# Altium PCB zb_sensor.PcbDoc
Units mil, origin at the board's own origin, x right, y up, seen from the top; angles counter-clockwise.
Board outline 2050 x 2075 mil, 2 copper layers (Top Layer, Bottom Layer); 38 components, 26 nets, 118 pads, 6 vias.
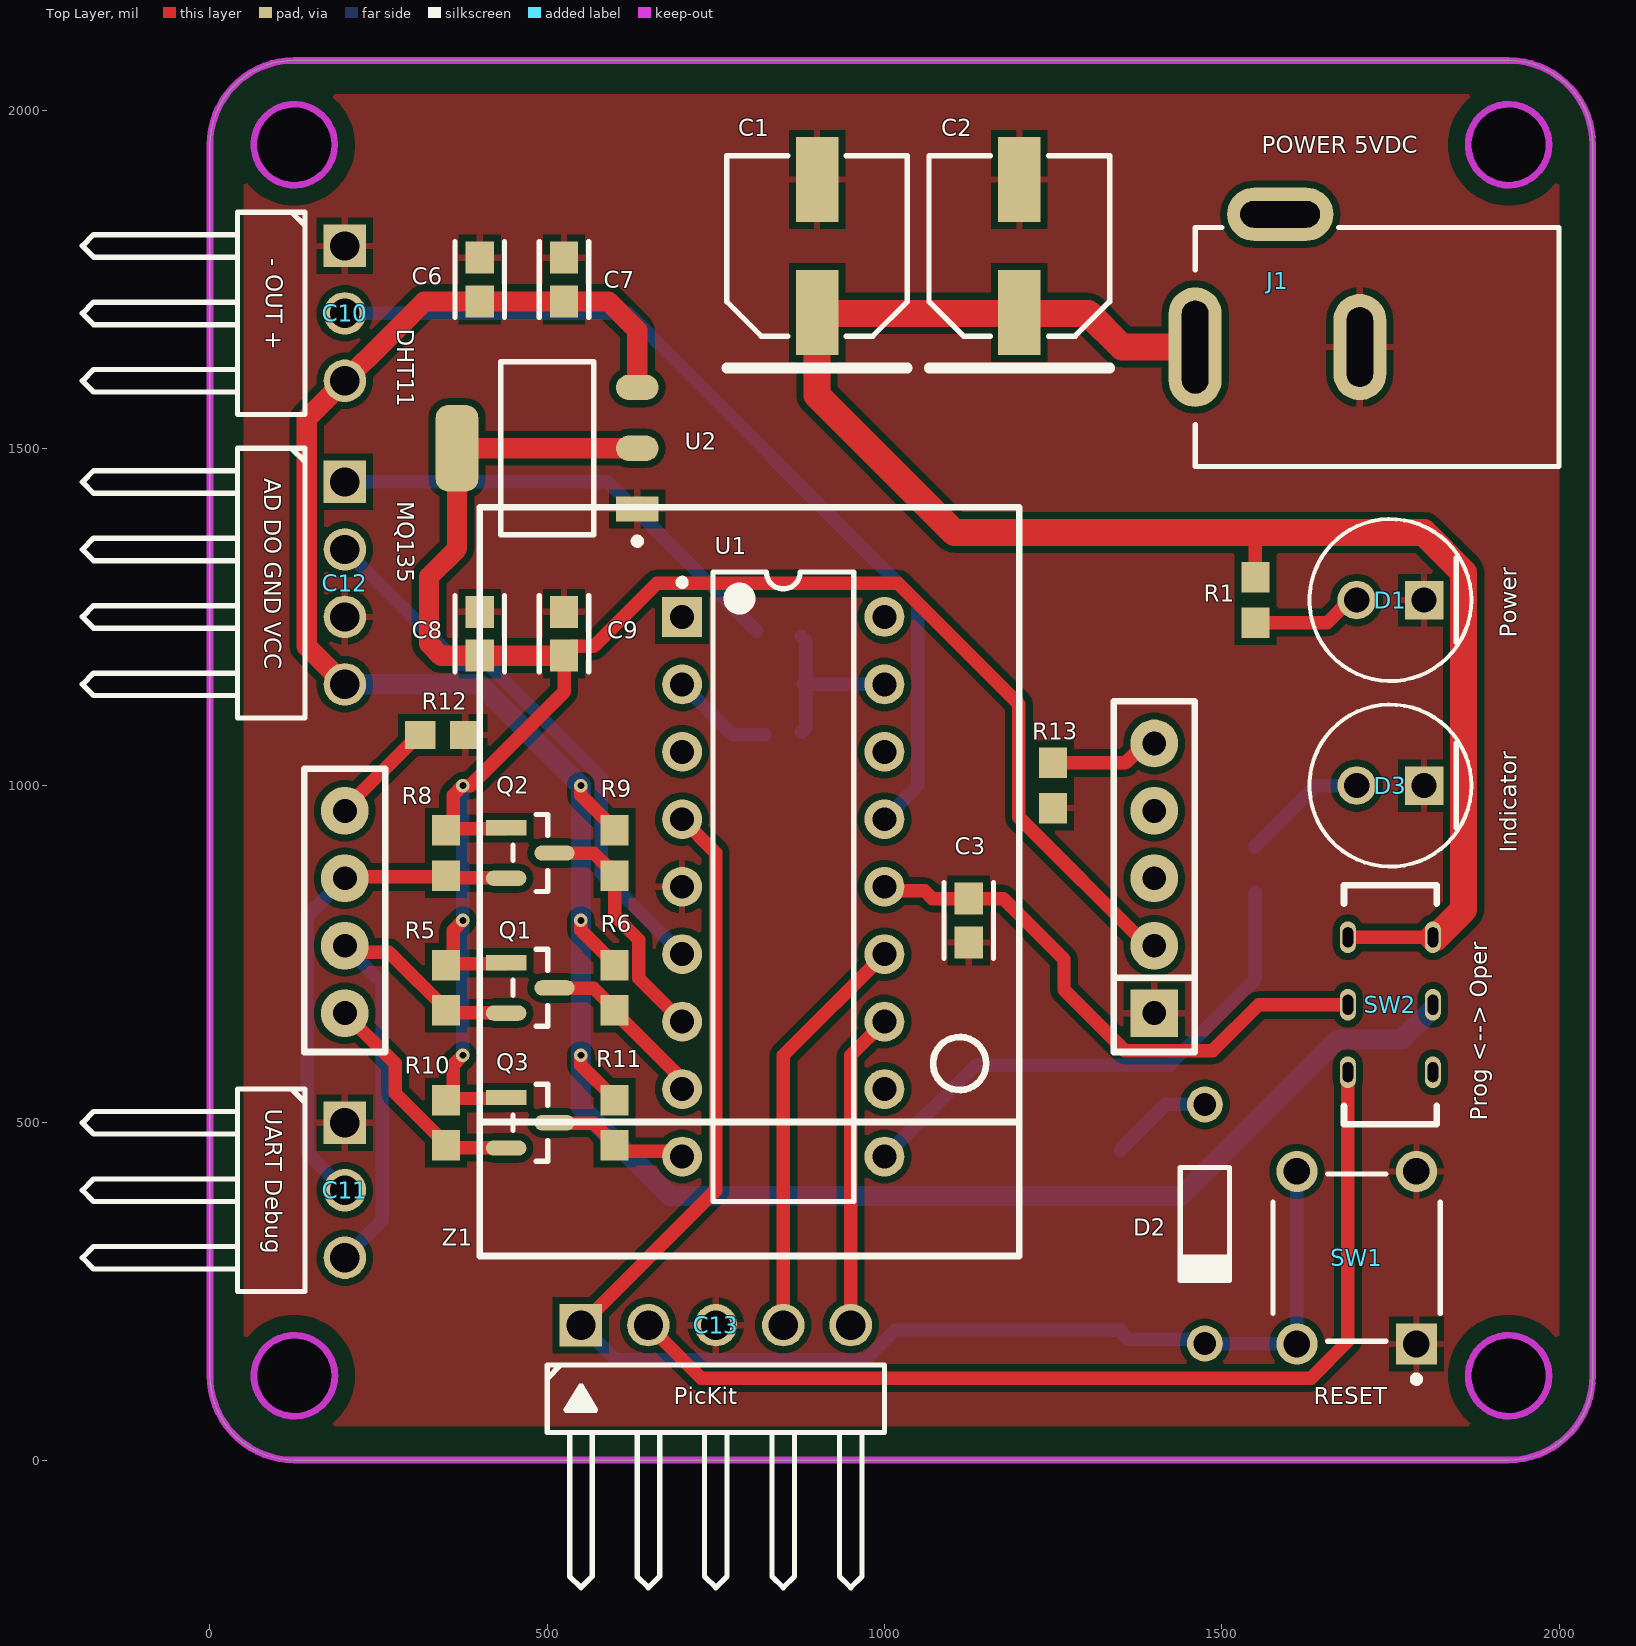
[diagram p0: Top Layer view]
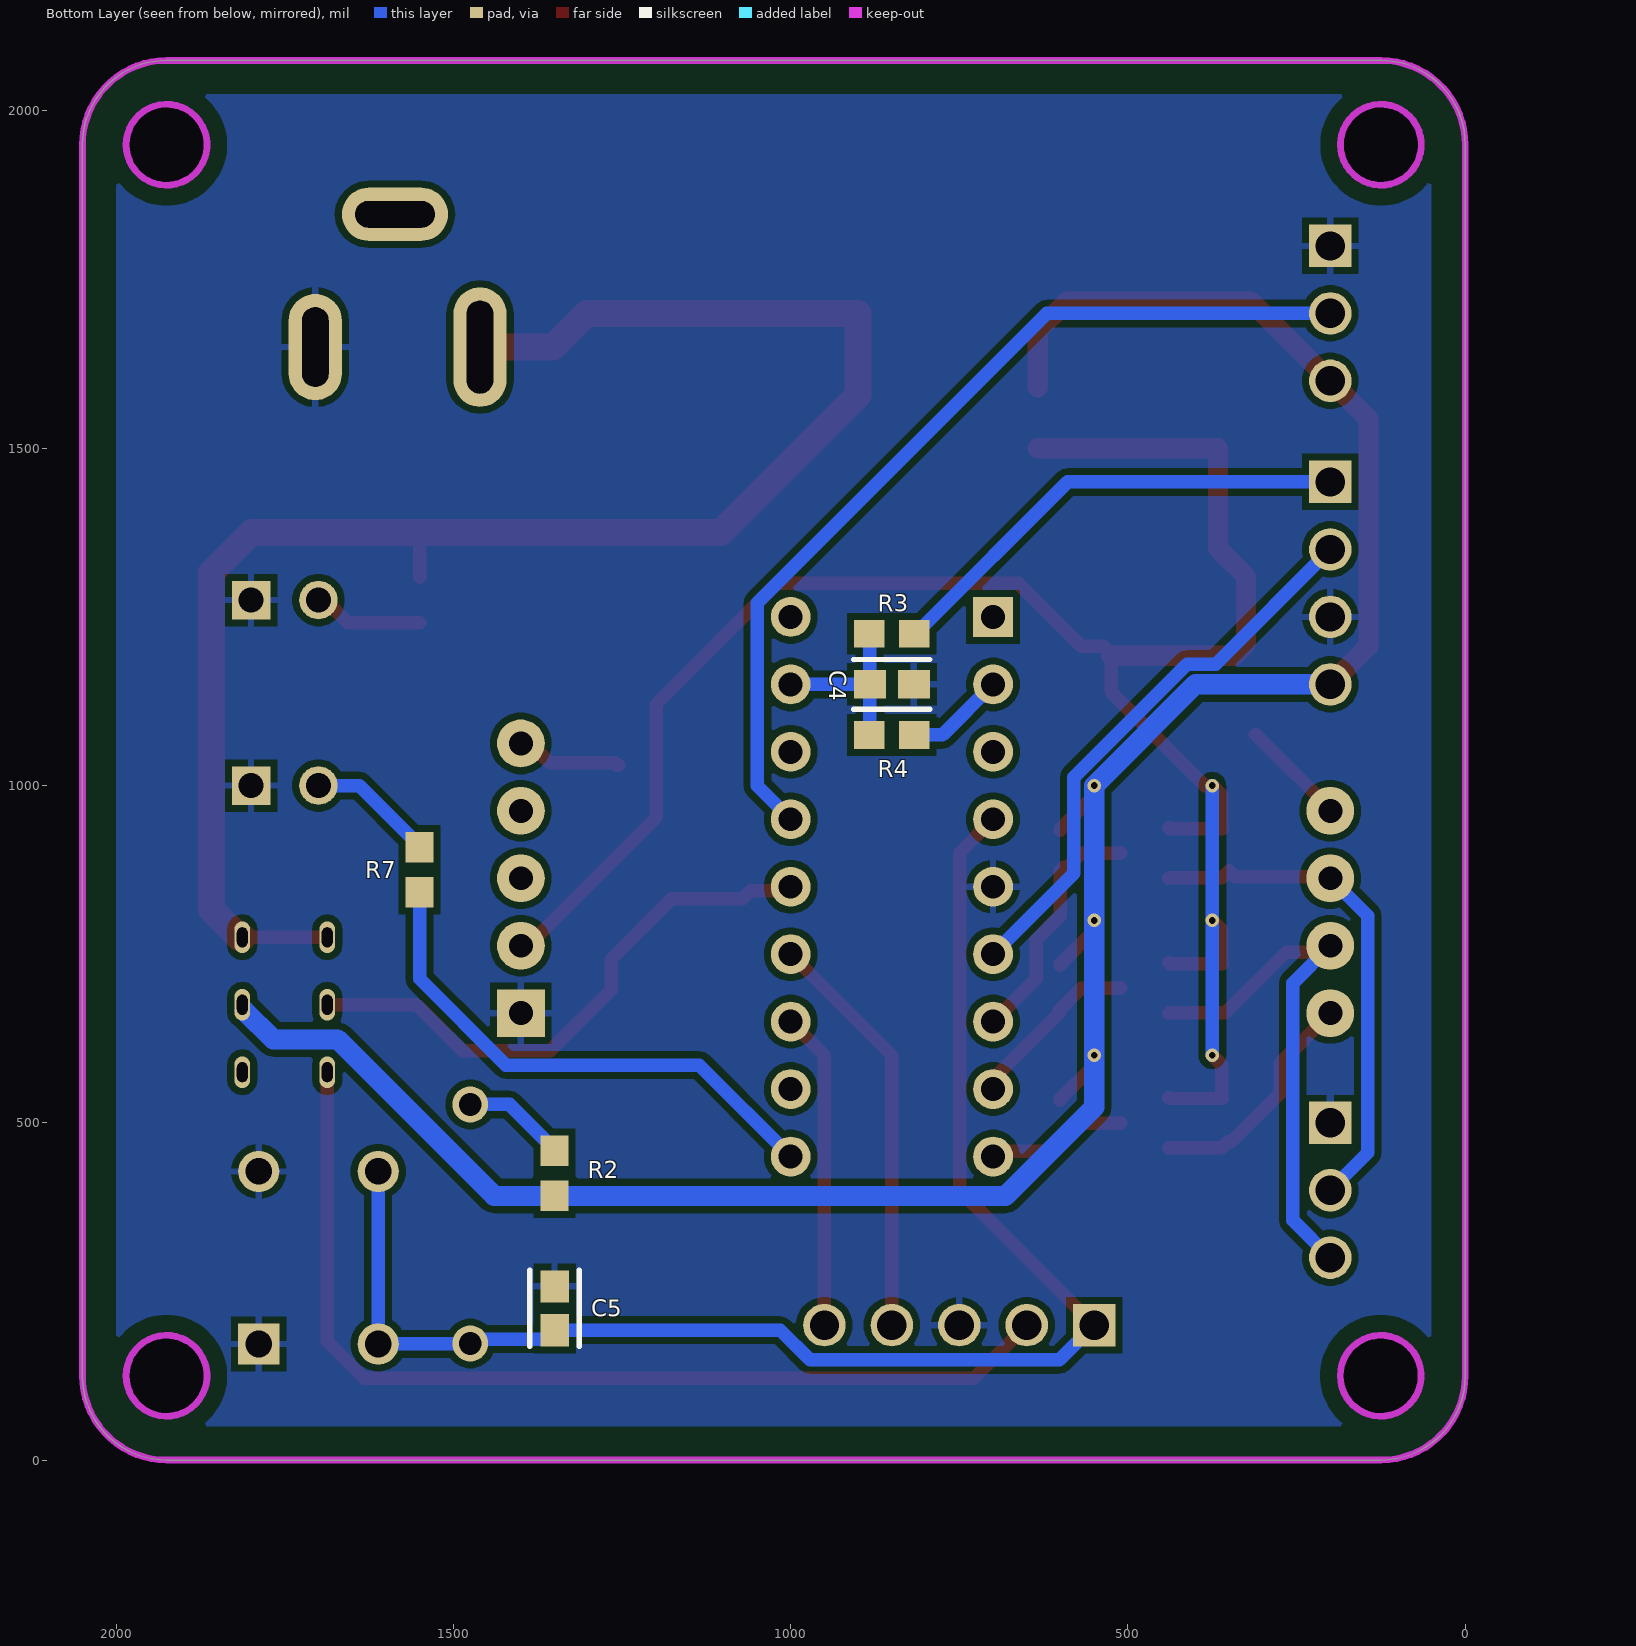
[diagram p1: Bottom Layer view, seen from below]
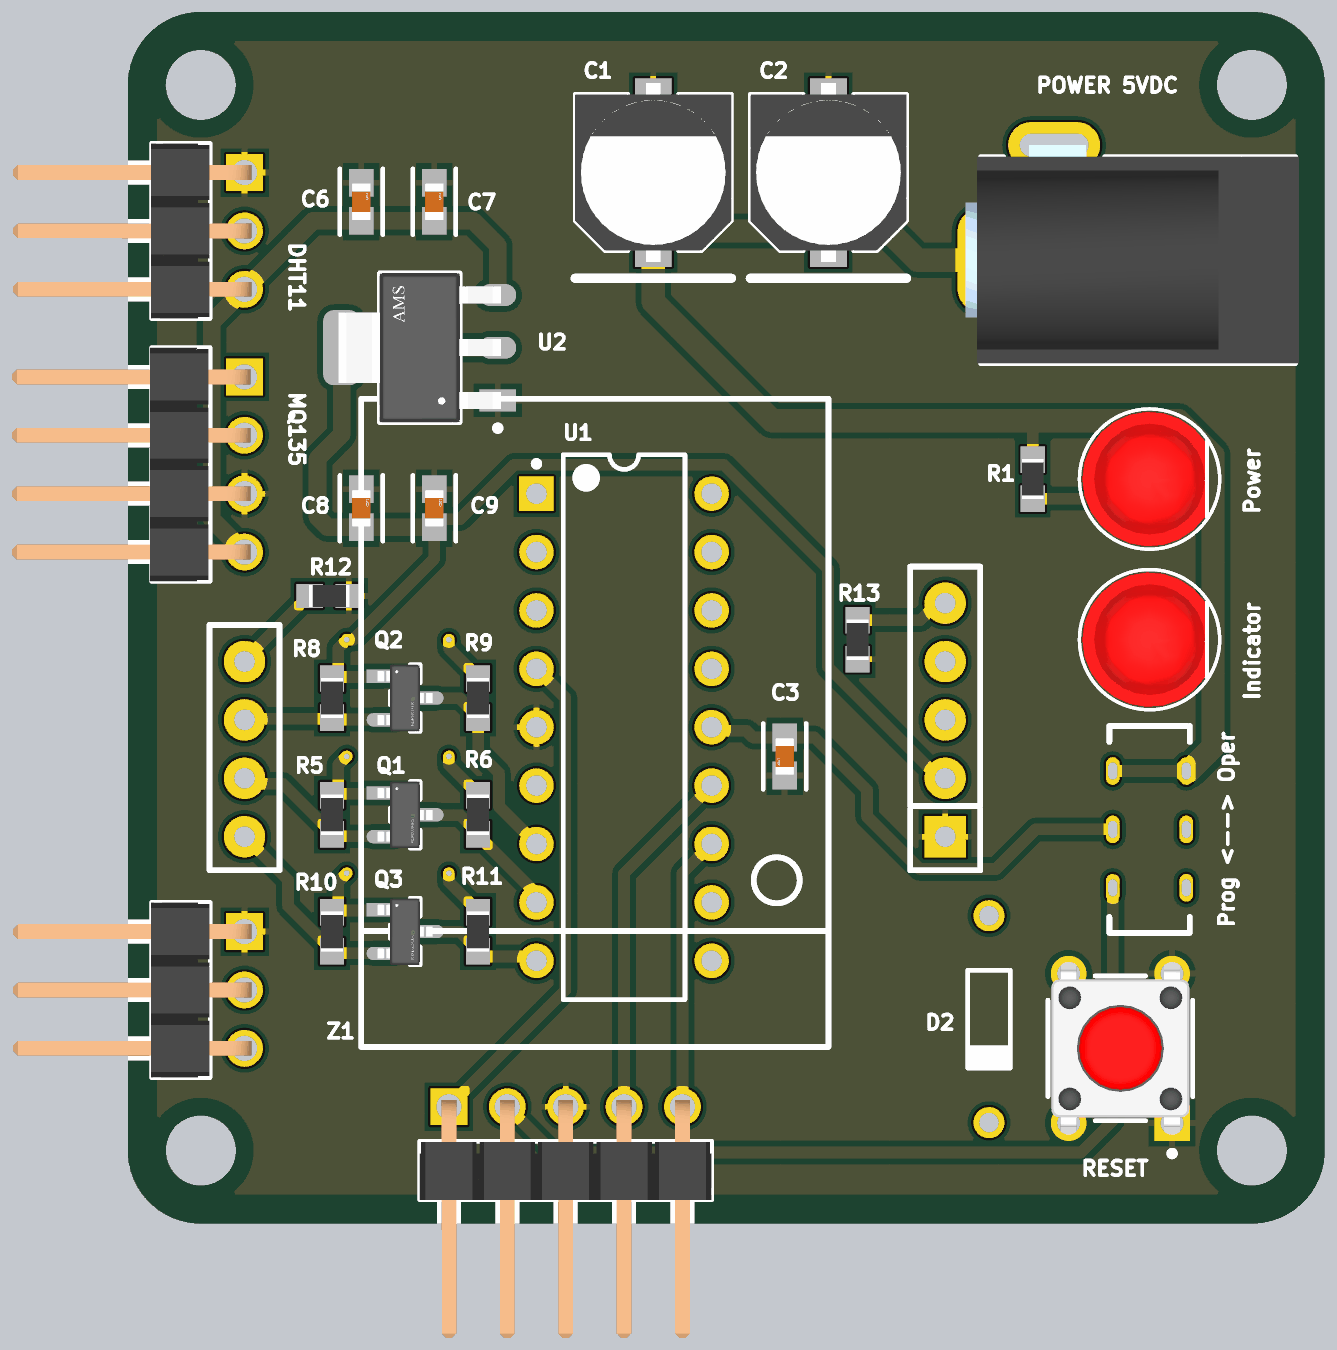
[diagram p2: 3D render of the assembled board from above, using the file's embedded part models]
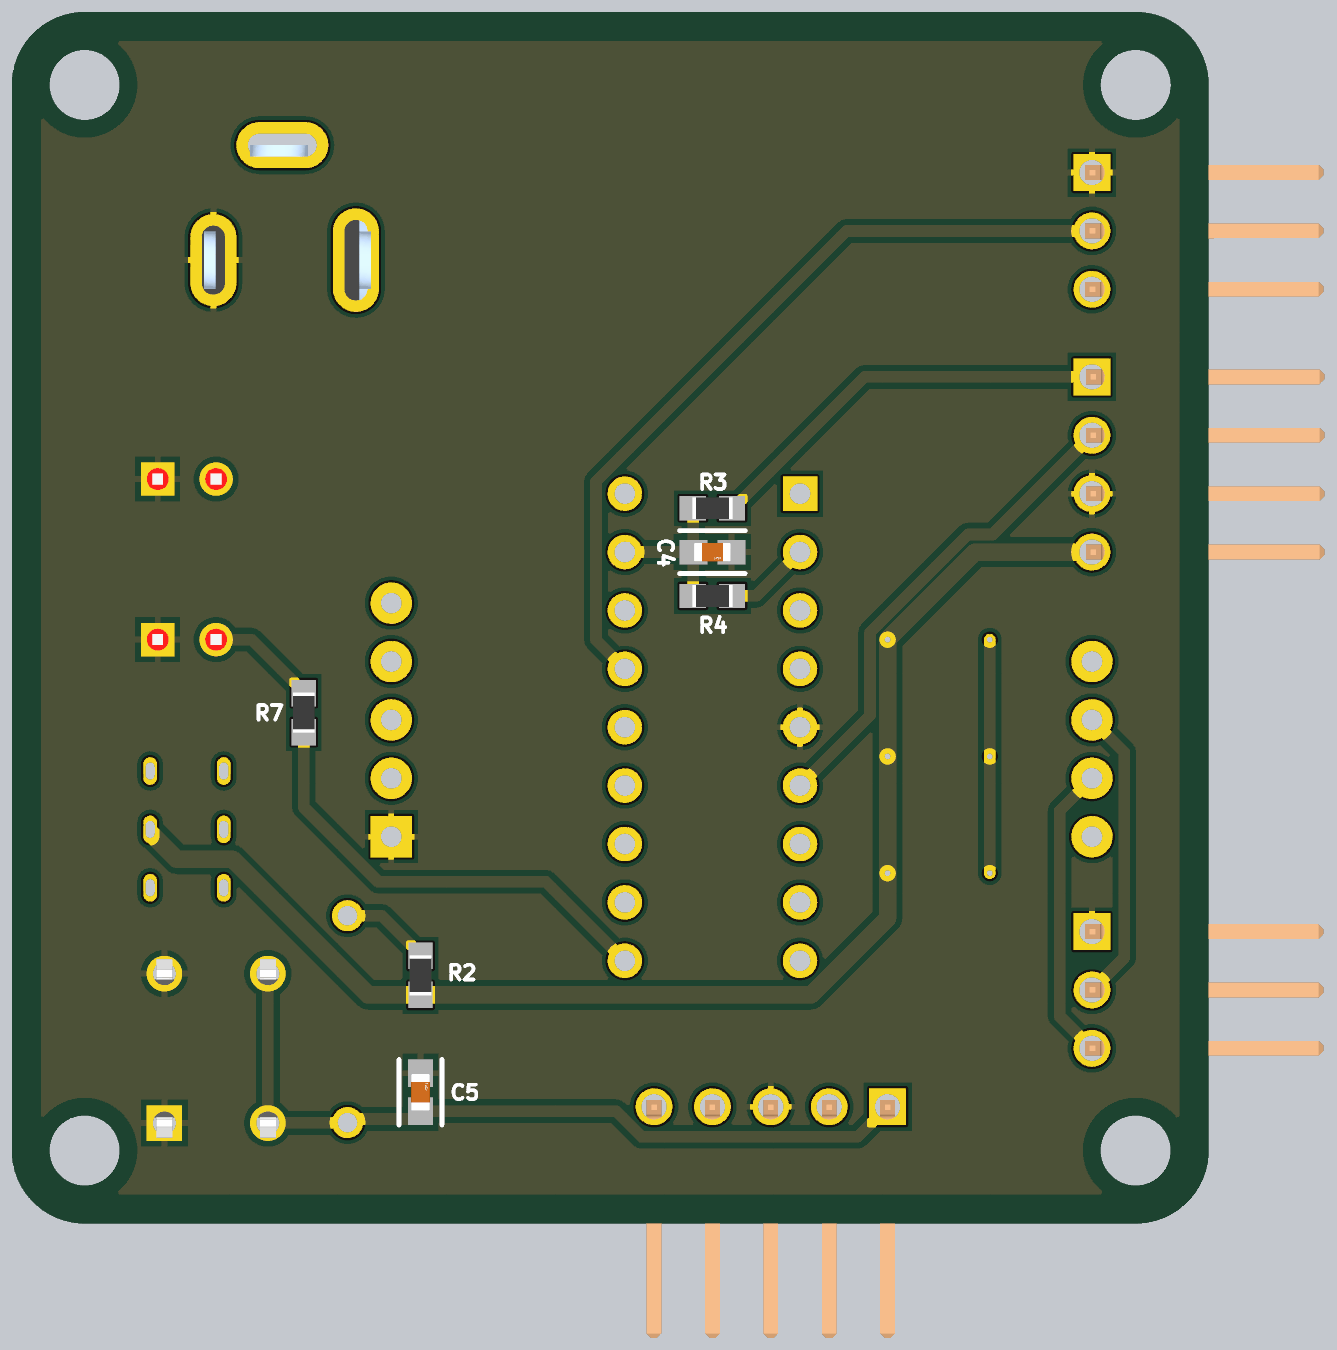
[diagram p3: 3D render of the assembled board from below, using the file's embedded part models]

## Layer stack, top to bottom
Top Solder: solder mask 0.4, Solder Resist, Dk 3.5
Top Layer: signal copper 1.4
Dielectric 1: dielectric 12.6, FR-4, Dk 4.8
Bottom Layer: signal copper 1.4
Bottom Solder: solder mask 0.4, Solder Resist, Dk 3.5

## Board outline
125,0 cw(c125,125) 0,125 0,1950 cw(c125,1950) 125,2075 1925,2075 cw(c1925,1950) 2050,1950 2050,125 cw(c1925,125) 1925,0
cut-out: 125,1890 cw(c125,1950) 65,1950 cw(c125,1950) 125,2010 cw(c125,1950) 185,1950 cw(c125,1950)
cut-out: 1925.25,64.98 cw(c1925.25,124.98) 1865.25,124.98 cw(c1925.25,124.98) 1925.25,184.98 cw(c1925.25,124.98) 1985.25,124.98 cw(c1925.25,124.98)
cut-out: 1925.25,1889.98 cw(c1925.25,1949.98) 1865.25,1949.98 cw(c1925.25,1949.98) 1925.25,2009.98 cw(c1925.25,1949.98) 1985.25,1949.98 cw(c1925.25,1949.98)
cut-out: 125.25,64.98 cw(c125.25,124.98) 65.25,124.98 cw(c125.25,124.98) 125.25,184.98 cw(c125.25,124.98) 185.25,124.98 cw(c125.25,124.98)

## Design rules (kind name [scope] priority, off if disabled: settings)
Clearance [All] p1: gap=5 ignorepadtopadclearanceinfootprint=TRUE except(10: Track-THPad Track-Poly SMDPad-Poly THPad-Poly Via-Poly; 30: Poly-Region)
ComponentClearance [All] p1: gap=0 collisioncheckmode=3 verticalgap=0 showdistances=FALSE
HoleSize [All] p1: absolutevalues=TRUE maxlimit=150 minlimit=1 maxpercent=80.000 minpercent=20.000
MinimumSolderMaskSliver [All] p1: minsoldermaskwidth=1
PolygonConnect [All] p1: connectstyle=Relief reliefconductorwidth=10 reliefentries=4 polygonreliefangle="90 Angle" airgapwidth=10
RoutingVias [All] p1: holewidth=10 width=20 viastyle="Through Hole" minholewidth=5 minwidth=10 maxholewidth=20 maxwidth=50
SilkToSilkClearance [All] p1: silktosilkclearance=5
SilkToSolderMaskClearance [IsPad] p1: minsilkscreentomaskgap=5 clearancetoexposedcopper=TRUE
SolderMaskExpansion [All] p1: expansion=4 istentingtop=FALSE
Width [All] p1: maxlimit=100 minlimit=10 preferedwidth=20
25 further rules are at their usual default settings.

## Components (designator, comment, footprint, x,y, rotation, side; value= is the part's Value field where it differs from the comment)
C1 "100uF" PNSC-FK-V-D8_V 900,1800 r90 top
C2 "100uF" PNSC-FK-V-D8_V 1200,1800 r90 top
C3 "0.1uF" FP-0603-L_1_6_0_15-W_0_81-IPC_A 1125,800 r270 top
C4 "0.1uF" FP-0603-L_1_6_0_15-W_0_81-IPC_A 850,1150 r180 bottom
C5 "10μF" FP-0603-L_1_6_0_15-W_0_81-IPC_A 1350,225 r90 bottom
C6 "100nF" FP-0603-L_1_6_0_15-W_0_81-IPC_A 400,1750 r90 top
C7 "10μF" FP-0603-L_1_6_0_15-W_0_81-IPC_A 525,1750 r90 top
C8 "10μF" FP-0603-L_1_6_0_15-W_0_81-IPC_A 400,1225 r90 top
C9 "100nF" FP-0603-L_1_6_0_15-W_0_81-IPC_A 525,1225 r90 top
C10 "DHT11" JP3-D1C 100,1550 r270 top
C11 "UART Debug" JP3-D1C 100,250 r270 top
C12 "MQ135" JP4-D1C 100,1100 r270 top
C13 "PicKit" JP5-D1C 1000,100 r0 top
D1 "Power" FP-HLMP-4700-MFG 1750,1275 r180 top
D2 "1N4148" NXP-SOD27-2_V 1475,350 r270 top
D3 "Indicator" FP-HLMP-4700-MFG 1750,1000 r180 top
J1 "POWER 5VDC" KYCN-KLDX-0202-B_V 2000,1650 r180 top
Q1 "BSS138" FP-318-08-IPC_B 475,700 r0 top
Q2 "BSS138" FP-318-08-IPC_B 475,900 r0 top
Q3 "BSS138" FP-318-08-IPC_B 475,500 r0 top
R1 "1K" RESC1609X55X30ML15T15 1550,1275 r90 top
R2 "10K" RESC1609X55X30ML15T15 1350,425 r270 bottom
R3 "47K" RESC1609X55X30ML15T15 850,1225 r180 bottom
R4 "47K" RESC1609X55X30ML15T15 850,1075 r0 bottom
R5 "10K" RESC1609X55X30ML15T15 350,700 r90 top
R6 "10K" RESC1609X55X30ML15T15 600,700 r90 top
R7 "510" RESC1609X55X30ML15T15 1550,875 r270 bottom
R8 "10K" RESC1609X55X30ML15T15 350,900 r90 top
R9 "10K" RESC1609X55X30ML15T15 600,900 r90 top
R10 "10K" RESC1609X55X30ML15T15 350,500 r90 top
R11 "10K" RESC1609X55X30ML15T15 600,500 r90 top
R12 "10K" RESC1609X55X30ML15T15 345,1075 r180 top
R13 "10K" RESC1609X55X30ML15T15 1250,1000 r90 top
SW1 "RESET" FP-EVQ-PAG05R-MFG 1700,300 r180 top
SW2 "MH-G6" MH-G6 1750,675 r270 top
U1 "PIC16F628A-I/P" PDIP300-P18 850,850 r0 top
U2 "AMS1117-3.3" FP-AMS1117-IPC_A 500,1500 r180 top
Z1 "SZ1V5" "SZ1V5 PINOUT MODULE" 800,975 r180 top

## Footprints (in the part's own frame and the unit in brackets; to place one, negate y for a bottom-side part, rotate by r counter-clockwise, add the part's x,y. Pads: shape width x height; smd on the part's side, far side on the other; paste and mask are expansions set on the pad)
FP-318-08-IPC_B [mm]
  rect 1.524x0.578 smd paste+0 mask+0: 1(-0.91,0.95)
  rrect100% 1.524x0.578 smd paste+0 mask+0: 2(-0.91,-0.95) 3(0.91,0)
  silkscreen extent -0.65,-1.45 0.65,1.45, body extent -1.92,-1.7 1.92,1.7, height 0.25
FP-0603-L_1_6_0_15-W_0_81-IPC_A [mil]
  rect 47.5x42.06 smd paste+0 mask+0: 1(-32.51,0) 2(32.51,0)
  silkscreen extent -56,-37 56,37, body extent -76,-41 76,41, height 10
FP-AMS1117-IPC_A [mm]
  rect 1.604x0.952 smd paste+0 mask+0: 1(-3.395,2.29)
  rrect100% 1.604x0.952 smd paste+0 mask+0: 2(-3.395,0) 3(-3.395,-2.29)
  rrect59% 1.604x3.262 smd paste+0 mask+0: 4(3.395,0)
  silkscreen extent -3.52,-3.25 1.75,3.62, body extent -4.7,-3.75 4.7,3.75, height 0.25
FP-EVQ-PAG05R-MFG [mm]
  rect 1.55x1.55 hole 1 paste-1000 mask+0: A(-2.25,3.25)
  round 1.55 hole 1 paste-1000 mask+0: A'(-2.25,-3.25) B(2.25,3.25) B'(2.25,-3.25)
  silkscreen extent -3.15,-3.15 3.15,4.7, body extent -3.25,-4.13 3.25,4.13, height 0.25
FP-HLMP-4700-MFG [mm]
  rect 1.45x1.45 hole 0.95 paste-1000 mask+0: 1(-1.27,0)
  round 1.45 hole 0.95 paste-1000 mask+0: 2(1.27,0)
  silkscreen extent -3.05,-3.05 3.05,3.05, body extent -3.15,-3.15 3.15,3.15, height 0.25
JP3-D1C [mm] "3 pins, 1 row, right angled, gold plating"
  rect 1.6x1.6 hole 1.1: 1(-6.35,2.54)
  round 1.6 hole 1.1: 2(-3.81,2.54) 3(-1.27,2.54)
  silkscreen extent -7.62,-7.34 0,1.04, body extent -7.62,-7.52 0,2.84, height 2.55
JP4-D1C [mm] "4 pins, 1 row, right angled, gold plating"
  rect 1.6x1.6 hole 1.1: 1(-8.89,2.54)
  round 1.6 hole 1.1: 2(-6.35,2.54) 3(-3.81,2.54) 4(-1.27,2.54)
  silkscreen extent -10.16,-7.34 0,1.04, body extent -10.16,-7.57 0,2.79, height 2.54
JP5-D1C [mm] "5 pins, 1 row, right angled, gold plating"
  rect 1.6x1.6 hole 1.1: 1(-11.43,2.54)
  round 1.6 hole 1.1: 2(-8.89,2.54) 3(-6.35,2.54) 4(-3.81,2.54) 5(-1.27,2.54)
  silkscreen extent -12.7,-7.34 0,1.04, body extent -12.7,-7.52 0,2.84, height 2.55
KYCN-KLDX-0202-B_V [mm] "3 Conductor Jack, 9 x 14.5 mm Body"
  oval 2x4.5 hole 1 slot 3.5 at 90 deg: 1(13.7,0)
  oval 2x4 hole 1 slot 3 at 90 deg: 2(7.5,0)
  oval 4x2 hole 1 slot 3 at 0 deg: 3(10.5,-5)
  silkscreen extent 0,-4.5 13.7,4.5, body extent -0.15,-5 14.35,4.5, height 11
MH-G6 [mm]
  rrect100% 1.2x0.6 hole 0.4 slot 0.75 at 0 deg: 1(-2.54,-1.6) 2(0,-1.6) 3(2.54,-1.6) 4(-2.54,1.6) 5(0,1.6) 6(2.54,1.6)
  silkscreen extent -4.5,-1.75 4.5,1.75
NXP-SOD27-2_V [mm] "SOD27, 2-Leads, Dia 1.85mm, Body Length 4.25mm, Pin Spacing 9mm"
  round 1.35 hole 0.85: 1(-4.5,0) 2(4.5,0)
  silkscreen extent -2.12,-0.93 2.12,0.92, body extent -4.78,-0.92 4.78,0.92, height 1.84
PDIP300-P18 [mm] "DIP, 18-Pin, Row Spacing 7.62 mm, Pitch 2.54 mm"
  rect 1.5x1.5 hole 0.9: 1(-3.81,10.16)
  round 1.5 hole 0.9: 2(-3.81,7.62) 3(-3.81,5.08) 4(-3.81,2.54) 5(-3.81,0) 6(-3.81,-2.54) 7(-3.81,-5.08) 8(-3.81,-7.62) 9(-3.81,-10.16) 10(3.81,-10.16) 11(3.81,-7.62) 12(3.81,-5.08) 13(3.81,-2.54) 14(3.81,0) 15(3.81,2.54) 16(3.81,5.08) 17(3.81,7.62) 18(3.81,10.16)
  silkscreen extent -3.93,-11.85 2.65,11.85, body extent -3.6,-11.8 3.6,11.8, height 5.33
PNSC-FK-V-D8_V [mm] "CAPAE, 2-Leads, Body 6.80x6.80mm"
  rect 3.2x1.6 smd: 1(-2.5,0) 2(2.5,0)
  silkscreen extent -4.6,-3.4 3.4,3.4, body extent -3.9,-3.4 3.9,3.4, height 8
RESC1609X55X30ML15T15 [mm] "Chip Resistor, 2-Leads, Body 1.75x0.95mm, IPC Low Density"
  rect 1.15x1.05 smd: 1(-0.85,0) 2(0.85,0)
  body extent -0.87,-0.48 0.87,0.48, height 0.55
"SZ1V5 PINOUT MODULE" [mm]
  rect 1.8x1.8 hole 0.9: 1(-15.24,7.937)
  round 1.8 hole 0.9: 3(-15.24,5.397) 5(-15.24,2.857) 6(-15.24,0.317) 7(-15.24,-2.223) 13(15.24,7.938) 16(15.24,5.398) 17(15.24,2.858) 24(15.24,0.318)
  silkscreen extent -16.76,-11.11 16.76,17.08

## Part data
C1 C2: library part CMP-2000-06206-1, "Aluminum Electrolytic Capacitor, 100 uF, +/- 20%, 25 V, 2-Pin SMD (Size Code D8), -55 to 105 degC, RoHS, Tape and Reel", Capacitance=100µF, Case Size/Dimension=Ø6.3x7.7mm, Lifetime@Temperature=2000Hrs@105°C, Manufacturer=Panasonic, Operating Temp Range=-55to+105°C, Operating Temp-Max=105°C, Package Description="2-Pin Electrolytic Aluminum Capacitor, Body 6.6 x 6.6 mm", Package Reference=FK-V-D8, Rated Voltage=25V, Ripple Current=280mA, Datasheet URL=http://industrial.panasonic.com/cdbs/www-data/pdf/RDE0000/ABA0000C1181.pdf, Datasheet Version=03/2016, Impedance=0.34O, Manufacturer URL=http://www.panasonic.com/, Mounting Technology=SurfaceMount, Package URL=http://industrial.panasonic.com/cdbs/www-data/pdf/RDE0000/DME0000COL48.pdf, Series=FK, Type=Can
C3 C4 C5 C7 C8: library part CMP-1035-02592-4, "General Purpose Ceramic Capacitor, 0603, 100nF, 10%, X7R, 15%, 50V", Capacitance=100nF, Case Code (Imperial)=0603, Case Code (Metric)=1608, Dielectric=X7R, Dielectric Material=Ceramic, Max Operating Temperature=125°C, Min Operating Temperature=-55°C, Package Quantity=1, Tolerance=10%, Voltage=50V, Case/Package=0603, Contact Plating=Tin, Depth=0.81mm, Dissipation Factor=2.5%, Height=0.9mm, Lead Free="Lead Free", Length=1.6mm, Mount="Surface Mount", Number of Pins=2, Packaging="Tape and Reel", Radiation Hardening=No, REACH SVHC="No SVHC", Termination=SMD/SMT, Thickness=0.035inch, Voltage Rating=50V, Voltage Rating (DC)=50V, Width=0.81mm
C6 C9: library part CMP-1035-02592-4, "General Purpose Ceramic Capacitor, 0603, 100nF, 10%, X7R, 15%, 50V", Case Code (Imperial)=0603, Case Code (Metric)=1608, Dielectric=X7R, Dielectric Material=Ceramic, Max Operating Temperature=125°C, Min Operating Temperature=-55°C, Package Quantity=1, Tolerance=10%, Voltage=50V, Capacitance=100nF, Case/Package=0603, Contact Plating=Tin, Depth=0.81mm, Dissipation Factor=2.5%, Height=0.9mm, Lead Free="Lead Free", Length=1.6mm, Mount="Surface Mount", Number of Pins=2, Packaging="Tape and Reel", Radiation Hardening=No, REACH SVHC="No SVHC", Termination=SMD/SMT, Thickness=0.035inch, Voltage Rating=50V, Voltage Rating (DC)=50V, Width=0.81mm
C10 C11: library part JP3, "WR-PHD 2.54 mm Angled Socket Header", Manufacturer="W¨¹rth Elektronik eiSos GmbH", partNo=613003143121, ComponentLink1 Description=Manufacturer, ComponentLink1URL=http://www.we-online.com, ComponentLink2 Description=Datasheet, ComponentLink2URL=http://katalog.we-online.de/em/datasheet/6130xx143121.pdf, Created by="Karrer Zheng", Created Date="29 March 2013", NoPins=03
C12: library part JP4, "WR-PHD 2.54 mm Angled Socket Header", Manufacturer="W¨¹rth Elektronik eiSos GmbH", partNo=613004143121, ComponentLink1 Description=Manufacturer, ComponentLink1URL=http://www.we-online.com, ComponentLink2 Description=Datasheet, ComponentLink2URL=http://katalog.we-online.de/em/datasheet/6130xx143121.pdf, Created by="Karrer Zheng", Created Date="29 March 2013", NoPins=04
C13: library part JP5, "WR-PHD 2.54 mm Angled Socket Header", Manufacturer="W¨¹rth Elektronik eiSos GmbH", partNo=613005143121, ComponentLink1 Description=Manufacturer, ComponentLink1URL=http://www.we-online.com, ComponentLink2 Description=Datasheet, ComponentLink2URL=http://katalog.we-online.de/em/datasheet/6130xx143121.pdf, Created by="Karrer Zheng", Created Date="29 March 2013", NoPins=05
D1 D3: library part CMP-18399-000008-1, "LED RED DIFFUSED T-1 3/4 T/H", Colour=Red, Forward Current=2mA, Forward Voltage=1.7V, Manufacturer=Broadcom, Manufacturer Part Number=HLMP-4700, Power Dissipation=14mW, Reverse Voltage=5V, Temperature="-40°C to +100°C", Temperature Range High=+100°C, Temperature Range Low=-40°C, Automotive=No, Category=Diode, ComponentLink2Description=Datasheet, ComponentLink2URL=https://docs.broadcom.com/docs/AV02-1557EN, Device Class L1=Optoelectronics, Device Class L2=LEDs, Device Class L3=unset, Digikey Description="LED RED DIFFUSED T-1 3/4 T/H", Lead Free=Yes, Led Orientation=Straight, Luminous Intensity=2.3mcd, Mouser Description="LED; Red; 2.3mcd; 0.24In.Dia.; T-1-3/4; 500mA; 1.7V; 635nm; 50deg; 5V; 24mW; -55degC;", Octopart=https://octopart.com/hlmp-4700-broadcom-71130526, Package=HLMP-4700, Peak Emmision Wavelength=635nm, RoHS=TRUE, Viewing Angle=50°, Wavelength=626nm
D2: library part CMP-0648-00002-1, "High-speed Diode, 100 V, 450 mA, 2-Pin SOD27, RoHS", Manufacturer="NXP Semiconductors", Cd="4 pF Max.", ComponentLink1Description="Manufacturer URL", ComponentLink1URL=http://www.nxp.com/, ComponentLink2Description=Datasheet, ComponentLink2URL=http://www.nxp.com/documents/data_sheet/1N4148_1N4448.pdf, ComponentLink3Description="Package Specification", ComponentLink3URL=http://www.nxp.com/documents/data_sheet/1N4148_1N4448.pdf, Configuration=Single, DatasheetVersion=Aug-04, IF="200 mA Max.", IFRM="450 mA", IFSM="4 A Max.", IR (VR="20 V)=25 nA", Mounting Technology="Through Hole", PackageDescription="2-Pin Hermetically Sealed Glass Package, Axial Leaded, Dia 1.85 mm, Body Length 4.25 mm, Lead Spread 25.4 mm", PackageReference=SOD27, PackageVersion=Aug-04, PartNumber=1N4148, RoHS=TRUE, Trr="4 ns Max.", VF (IF="10 mA)=1 V", VR="100 V Max."
J1: library part CMP-0256-00001-1, "3 Conductor Power Jack, 2 break 2 aux contacts", PartNumber=KLDX-0202-B, ComponentLink1Description="Manufacturer URL", ComponentLink1URL=http://kycon.com/, ComponentLink2Description=Datasheet, ComponentLink2URL=http://anacapa.kycon.com/Catalog_PDF/KLDX_0202.pdf, Contact Finish=Brass, Mounting Technology="Through Hole", PackageDescription="Jack, 9 x 14.5 mm Body, 2.5 mm Center Pin Diameter", PackageReference=KLDX-0202-B
Q1 Q2 Q3: library part CMP-07173-000101-1, "MOSFET N-CH 50V 220MA SOT-23", Case/Package=SOT-23, Continuous Drain Current (ID)=220mA, Drain to Source Breakdown Voltage=50V, Drain to Source Resistance=3.5R, Gate to Source Voltage (Vgs)=20V, Input Capacitance=27pF, Max Operating Temperature=150°C, Max Power Dissipation=360mW, Min Operating Temperature=-55°C, On-State Resistance=6R, Package Quantity=1, Threshold Voltage=1.3V, Contact Plating=Tin, Current Rating=220mA, Drain to Source Voltage (Vdss)=50V, Dual Supply Voltage=50V, Element Configuration=Single, Fall Time=9ns, Height=0.93mm, Lead Free="Lead Free", Length=2.92mm, Mount="Surface Mount", Nominal Vgs=1.3V, Number of Elements=1, Number of Pins=3, Packaging="Tape and Reel", Power Dissipation=360mW, Radiation Hardening=No, Rds On Max=3.5R, REACH SVHC="No SVHC", Rise Time=9ns, Termination=SMD/SMT, Turn-Off Delay Time=20ns, Turn-On Delay Time=2.5ns, Voltage Rating (DC)=50V, Weight=0.03g, Width=1.3mm
R1 R2 R3 R4 R5 R6 R7 R8 R9 R10 R11 R12 R13: library part CMP-1012-00623-3, "Chip Resistor, 10 KOhm, +/- 1%, 0.1 W, -55 to 155 degC, 0603 (1608 Metric), RoHS, Tape and Reel", Case Code (Imperial)=0603, Case Code (Metric)=1608, Manufacturer=Panasonic, Max Operating Temperature=155degC, Max Power Dissipation=100mW, Min Operating Temperature=-55degC, Package Description="2-Pin Surface Mount Device, Body 1.6 x 0.85 mm", Package Quantity=1, Package Reference=603, Resistance=10KOhm, Temperature Coefficient=100ppm\/degreesC, Tolerance=1%, Voltage Rating=75V, Case\/Package=0603, Composition=ThickFilm, Contact Plating=Tin, Datasheet URL=https://industrial.panasonic.com/cdbs/www-data/pdf/RDA0000/AOA0000C304.pdf, Datasheet Version=02/2017, Depth=0.8mm, Height=0.45mm, Lead Free=LeadFree, Length=1.6mm, Manufacturer URL=http://www.panasonic.com/, Military Standard=Not, Mount=SurfaceMount, Mounting Technology=SurfaceMount, Number of Pins=2, Number of Terminations=2, Packaging=TapeandReel, Power Rating=100mW, Radiation Hardening=No, REACH SVHC=NoSVHC, RoHSCompliant=true, Termination=SMD/SMT, Voltage Rating (DC)=75V, Width=0.031inch
SW1: library part CMP-05618-000039-1, "SWITCH TACTILE SPST-NO 0.02A 15V", Actuator Color=Red, Contact Current Rating=20mA, Contact Resistance=50mR, Max Operating Temperature=70°C, Max Voltage Rating (DC)=15V, Min Operating Temperature=-20°C, Operating Force=2.6N, Package Quantity=500, Actuator Length=1.6mm, Actuator Type=Standard, Contact Plating=Silver, Current Rating=20mA, Depth=6.5mm, Electrical Life=50000Cycles, Height=5mm, Illumination Type=Non-Illuminated, Lead Free="Lead Free", Length=6mm, Max Current Rating=20mA, Mechanical Life=50000Cycles, Mount="Through Hole", Orientation=Straight, Packaging=Bulk, Radiation Hardening=No, REACH SVHC="No SVHC", RoHS Compliant=Yes, Series=EVQPA, Size=6mm, Switch Function=Off-Mom, Switch Travel=0.25mm, Termination="PC Pin", Throw Configuration=SPST, Voltage Rating (DC)=15V, Width=6mm
SW2: "6-pin switch MH-G6 2.54mm"
U1: library part CMP-0115-00122-1, "FLASH-Based 8-Bit CMOS Microcontroller with nanoWatt Technology, 2K (x14-Bit words) FLASH, 224 Bytes SRAM, 18-Pin PDIP, 3.0 to 5.5V Supply Range, Industrial Temperature", Code_JEDEC=MS-001, DatasheetVersion="revF, Mar-2007", PackageDescription="18-Lead Plastic Dual In-Line (P) - 300 mil Body [PDIP]", PackageReference=PDIP300-P18, PackageVersion="revBB, Aug-2009"
U2: library part CMP-209535-000001-1, "LDO Voltage Regulators 1A, 3.3V", Dropout Voltage=1.1V, Manufacturer="Advanced Monolithic Systems", Max Junction Temp=+125°C, Max Power Dissipation=1.2W, Max Supply Voltage=15V, Nominal Supply Current=5mA, Output Current=1A, Output Voltage=3.3V, Package=AMS1117, Temperature="-40°C to +125°C", Temperature Range Low=-40°C, Automotive=No, Category=IC, ComponentLink2Description=Datasheet, ComponentLink2URL=http://www.advanced-monolithic.com/pdf/ds1117.pdf, Device Class L1="Integrated Circuits (ICs)", Device Class L2="Power Management ICs", Device Class L3="Voltage Regulators - Linear", Height=1.8mm, Ipc Land Pattern Name=SOT229P700X180-4, Lead Free=Yes, Manufacturer Part Number=AMS1117-3.3, Number Of Outputs=1, Octopart=https://octopart.com/ams1117-3.3-advanced+monolithic+systems-25899300, Output Type=Fixed, RoHS=TRUE, Standoff Height=0.64mm, Temperature Range High=+125°C
Z1: library part SZ1V5_Alt

## Via types
v1: diameter 20, hole 10, Top Layer to Bottom Layer, 6 vias

## Nets (pads, with @x,y where several pads share a name; then routed paths per layer and width w, separated by ;. In a path a pad name is that pad's centre, name@x,y a point inside that pad or via, vN(x,y) a via of type N, cw(c..) or ccw(c..) an arc to the next point about the centre after c; other vN are vias at no path point)
+3: C8.1 C9.1 Q1.1 Q2.1 Q3.1 R5.2 R8.2 R10.2 U2.2 U2.4 Z1.3 | length 3132.4
  Top Layer w20: R10.2@360.43,536.02 437.79,536.02 Q3.1 ; R10.2@360.67,536.26 360.67,585.67 v1(375,600) ; v1(375,800) 360.67,785.67 360.67,736.26 360.43,736.02 437.79,736.02 Q1.1 ; Q2.1 437.79,936.02 360.43,936.02 360.67,936.26 360.67,985.67 v1(375,1000) 386.26,1000 525,1138.74 C9.1 525,1195.21 536.03,1206.24 568.9,1206.24 662.19,1299.53 1020.51,1299.53 1199.33,1120.71 1199.33,952.69 1389.52,762.5 Z1.3
  Top Layer w30: C9.1 342.51,1192.49 324.94,1210.06 324.94,1309.86 366.34,1351.26 U2.4 U2.2
  Bottom Layer w20: v1(375,600) v1(375,1000)
+5: C1.1 C2.1 J1.1 R1.2 SW2.1 SW2.4 | length 2525.1
  Top Layer w20: R1.2 1550,1375 ; SW2.1 SW2.4
  Top Layer w40: J1.1 1352.12,1650 1302.12,1700 900,1700 900,1578.58 1103.58,1375 1550,1375 1799.51,1375 1858.54,1315.97 1858.54,815.98 1817.56,775 SW2.4
CFG0: R12.2 Z1.24 | length 159.9
  Top Layer w20: Z1.24 200,965.43 309.57,1075 R12.2
CFG1: R13.2 Z1.7 | length 158.6
  Top Layer w20: R13.2@1254.76,1030.35 1257.56,1030.35 1260.67,1033.46 1357.2,1033.46 1386.24,1062.5 Z1.7
DHT_OUT: C10.2 U1.15 | length 1368.5
  Bottom Layer w20: C10.2 620.04,1700 1049.53,1270.51 1049.53,999.53 U1.15
GND: C1.2 C2.2 C3.2 C4.2 C5.2 C6.2 C7.2 C8.2 C9.2 C10.1 C11.1 C12.3 C13.3 D1.1 D3.1 J1.2 R12.1 R13.1 SW1.A SW1.A' U1.5 U2.1 Z1.1
LED_IND: R7.2 U1.10 | length 787.3
  Bottom Layer w20: U1.10 1135.41,585.41 1422.06,585.41 1550,713.35 R7.2
MCLR/VPP: C5.1 C13.1 D2.2 SW1.B SW1.B' U1.4 | length 2219.3
  Top Layer w20: C13.1 749.53,399.53 749.53,900.47 U1.4
  Bottom Layer w20: C13.1 601.5,148.5 971.33,148.5 1015.31,192.49 C5.1 1350,190.21 1361.03,179.18 1468.66,179.18 1475.39,172.44 1611.42,172.44 SW1.B'
MQ135_AD: C12.1 R3.2 | length 702.4
  Bottom Layer w20: C12.1 589.57,1450 R3.2@810.79,1228.78
MQ135_DO: C12.2 U1.6 | length 832
  Bottom Layer w20: C12.2 370,1180 412.43,1180 580,1012.43 580,870 U1.6
NetC4_1: C4.1 R3.1 R4.2 U1.17 | length 268.2
  Bottom Layer w20: R4.2@876.42,1078.78 882.99,1085.35 882.99,1146.56 879.54,1150 882.99,1153.44 882.99,1214.65 R3.1@876.42,1221.22 ; C4.1 U1.17
NetD1_2: D1.2 R1.1 | length 163.9
  Top Layer w20: R1.1 1656.5,1241.54 1689.96,1275 D1.2
NetD2_1: D2.1 R2.1 | length 154.6
  Bottom Layer w20: R2.1 1350,460.43 1416.73,527.17 D2.1
NetD3_2: D3.2 R7.1 | length 189.1
  Bottom Layer w20: R7.1 1550,910.43 1639.57,1000 D3.2
NetR4_1: R4.1 U1.2 | length 154.5
  Bottom Layer w20: U1.2 775,1075 R4.1@823.43,1075
P_RST: Q3.3 R11.1 U1.9 | length 210.1
  Top Layer w20: Q3.3 511.36,499.47 569.03,499.47 600,468.5 600,468.14 610.67,457.47 692.53,457.47 U1.9
P_RX: Q2.3 R9.1 U1.7 | length 365.6
  Top Layer w20: Q2.3 511.36,899.47 569.03,899.47 589.33,879.17 595.24,879.17 600,874.41 600,807.23 635.67,771.56 635.67,714.33 U1.7
P_TX: Q1.3 R6.1 U1.8 | length 262.1
  Top Layer w20: Q1.3 511.36,699.47 569.03,699.47 601.97,666.54 601.97,662.6 692.53,572.04 692.53,557.47 U1.8
PGC: C13.5 U1.12 | length 470.7
  Top Layer w20: C13.5 950,600 U1.12
PGD: C13.4 U1.13 | length 612.1
  Top Layer w20: C13.4 850,600 U1.13
PK_VDD: C13.2 SW2.3 | length 1490.9
  Top Layer w20: C13.2 728.46,121.54 1632.34,121.54 1687.01,176.2 SW2.3
VCC: C6.1 C7.1 C10.3 C12.4 R2.2 R6.2 R9.2 R11.2 SW2.5 U2.3 | length 3660.5
  Top Layer w20: v1(550,600) 550,585.43 600,535.43 R11.2 ; v1(550,800) 550,785.43 600,735.43 R6.2 ; v1(550,1000) 550,985.43 600,935.43 R9.2
  Top Layer w30: C12.4 143.5,1206.5 143.5,1543.5 317.49,1717.49 591.03,1717.49 633.66,1674.85 U2.3
  Bottom Layer w30: C12.4 400,1150 v1(550,1000) 550,522.89 681.35,391.54 1439.67,391.54 1671.76,623.62 1767.05,623.62 SW2.5@1809.8,666.38
VDD: C3.1 SW2.2 U1.14 | length 843.9
  Top Layer w20: U1.14 1006,844 1059.53,844 1071.01,832.51 1176.03,832.51 1266.16,742.39 1266.16,697.19 1356.28,607.07 1486.84,607.07 1554.78,675 SW2.2@1688.68,675
Z_RST: Q3.2 R10.1 Z1.13 | length 347.7
  Top Layer w20: Z1.13 274.53,587.97 274.53,543.97 346.68,471.83 351.97,471.83 360.67,463.13 438.64,463.13 Q3.2
Z_RX: C11.3 Q1.2 R5.1 Z1.16 | length 789
  Top Layer w20: Z1.16 209.43,753.07 265.43,753.07 355.38,663.13 438.64,663.13 Q1.2
  Bottom Layer w20: C11.3 255.43,355.43 255.43,707.07 Z1.16
Z_TX: C11.2 Q2.2 R8.1 Z1.17 | length 756.9
  Top Layer w20: Z1.17 202.02,864.52 340.72,864.52 350,873.79 360.67,863.13 438.64,863.13 Q2.2
  Bottom Layer w20: C11.2 144.57,455.43 144.57,807.07 Z1.17
pads on no net: J1.3 SW2.6 U1.1 U1.3 U1.11 U1.16 U1.18 Z1.5 Z1.6

## Polygon pours and split planes (outlines as drawn)
no net on Top Overlay "NONET_L02_P003" (solid, pour order 3): 550,117.5 521.5,70 578.5,70
GND on Top Layer "GND_L01_P001" (solid, pour order 1): 50,2025 2000,2025 2000,50 50,50
GND on Bottom Layer "GND_L02_P000" (solid, pour order 0): 50,2025 2000,2025 2000,50 50,50

## Keep-outs
Keep-Out Layer:
  circle w10: c1925.25,124.98 r60
  circle w10: c1925.25,1949.98 r60
  circle w10: c125,1950 r60
  circle w10: c125.25,124.98 r60
  lines w10: 0,125 ccw(c125,125) 125,0 1925,0 ccw(c1925,125) 2050,125 2050,1950 ccw(c1925,1950) 1925,2075 125,2075 ccw(c125,1950) 0,1950 0,125

## Silkscreen, mask and mechanical layers (free items; w line width, h text height)
Top Overlay:
  text "- OUT +" at 83,1782 h25 r270
  text "AD DO GND VCC" at 80.83,1455.55 h25 r270
  text "Prog <--> Oper" at 1893.67,503 h25 r90